# EAGLE board TinkerCad 1-6 (EAGLE 9.7.0)

Size 389.98 x 385.79 mm. Coordinates in mm from the lower left corner, seen from the top.
Outline: 0,0 389.98,0 389.98,385.79 0,385.79 0,0
Copper layers (1*16): Top 0.035mm / dielectric 1.5mm / Bottom 0.035mm
Design rules "default": minimum track width 6mil, minimum drill 0.35mm, track to track 6mil, track to pad 6mil, pad to pad 6mil, via to via 6mil, smd to smd 6mil, copper to edge 40mil, drill to drill 6mil, minimum pad ring 10mil, minimum via ring 8mil, stop-mask expansion 4mil, vias tented up to drill 0mil, thermal gap 10mil

## Footprints (pad centres in the part's own frame; a part is rotated, then mirrored left to right if it is on the bottom)
LEDRD254W60D565H860B_G = drill 0.981 pad 1.581: 1 -1.27,0; 2 1.27,0
LEDRD254W60D565H860B = drill 0.981 pad 1.581: 1 -1.27,0; 2 1.27,0
LEDRD254W60D565H860B_W = drill 0.981 pad 1.581: 1 -1.27,0; 2 1.27,0
HC-SR04 = drill 1.016 long: 1 -3.81,0; 2 -1.27,0; 3 1.27,0; 4 3.81,0
28027 = drill 1.016 long: 1 -2.54,0; 2 0,0; 3 2.54,0
RESAD1016W63L850D250B = drill 0.83 pad 1.43: 1 -5.08,0; 2 5.08,0
SWITCH-MOMENTARY-PTH-6.5MM = drill 1.016 pad 1.88: 1 -3.251,2.261; 2 3.251,2.261; 3 -3.251,-2.261; 4 3.251,-2.261
ARDUINO-UNO-R3-SHIELD = drill 1.016 pad 1.88: 3.3V 24.13,-2.54; 5V 24.13,0; A0 24.13,12.7; A1 24.13,15.24; A2 24.13,17.78; A3 24.13,20.32; A4 24.13,22.86; A5 24.13,25.4; AREF -24.13,-13.97; D2 -24.13,20.32; D3 -24.13,17.78; D4 -24.13,15.24; D5 -24.13,12.7; D6 -24.13,10.16; D7 -24.13,7.62; D8 -24.13,3.81; D9 -24.13,1.27; D10 -24.13,-1.27; D11 -24.13,-3.81; D12 -24.13,-6.35; D13 -24.13,-8.89; GND@0 24.13,2.54; GND@1 24.13,5.08; GND@2 -24.13,-11.43; IOREF 24.13,-7.62; NC 24.13,-10.16; RES 24.13,-5.08; RX -24.13,25.4; SCL -24.13,-19.05; SDA -24.13,-16.51; TX -24.13,22.86; VIN 24.13,7.62

## Placement (x,y rotation side)
D1  GREEN  [LEDRD254W60D565H860B_G]  374.76,343.26 180 top
D2  RED  [LEDRD254W60D565H860B]  382.38,343.26 180 top
D3  WHITE  [LEDRD254W60D565H860B_W]  110.88,190.5 180 top
D4  WHITE  [LEDRD254W60D565H860B_W]  322.08,194.68 180 top
D5  WHITE  [LEDRD254W60D565H860B_W]  320.3,70.6 180 top
D6  RED  [LEDRD254W60D565H860B]  114.94,45.26 180 top
DIST1  DISTANCE-SENSOR-4PINHC-SR04  [HC-SR04]  117.35,332.52 0 top
DIST2  DISTANCE-SENSOR-4PINHC-SR04  [HC-SR04]  336.66,333.1 0 top
PIR1  PIR-SENSOR_28027  [28027]  151.77,63.04 0 top
R1  220  [RESAD1016W63L850D250B]  376.03,335.64 90 top
R2  220  [RESAD1016W63L850D250B]  383.65,335.64 90 top
R3  220  [RESAD1016W63L850D250B]  107.07,175.26 0 top
R4  220  [RESAD1016W63L850D250B]  323.35,187.06 90 top
R5  1000  [RESAD1016W63L850D250B]  343.67,171.82 90 top
R6  220  [RESAD1016W63L850D250B]  321.57,62.98 90 top
R7  1000  [RESAD1016W63L850D250B]  341.89,47.74 90 top
R8  220  [RESAD1016W63L850D250B]  116.21,37.64 90 top
S1  SWITCH_MOMENTARY  [SWITCH-MOMENTARY-PTH-6.5MM]  94.37,184.15 90 top
S2  SWITCH_MOMENTARY  [SWITCH-MOMENTARY-PTH-6.5MM]  341.13,188.33 90 top
S3  SWITCH_MOMENTARY  [SWITCH-MOMENTARY-PTH-6.5MM]  339.35,64.25 90 top
U1  ARDUINO-UNO-R3-SHIELD  [ARDUINO-UNO-R3-SHIELD]  39.75,337.32 180 top
U2  ARDUINO-UNO-R3-SHIELD  [ARDUINO-UNO-R3-SHIELD]  258.71,337.91 180 top
U3  ARDUINO-UNO-R3-SHIELD  [ARDUINO-UNO-R3-SHIELD]  29.84,185.12 180 top
U4  ARDUINO-UNO-R3-SHIELD  [ARDUINO-UNO-R3-SHIELD]  267.62,188.31 180 top
U5  ARDUINO-UNO-R3-SHIELD  [ARDUINO-UNO-R3-SHIELD]  265.84,64.22 180 top
U6  ARDUINO-UNO-R3-SHIELD  [ARDUINO-UNO-R3-SHIELD]  41.92,34.52 180 top

## Library data of the parts
D1 = Tinkercad; CATEGORY: Opto-Electronic; SUB-CATEGORY: LED; VALUE: LED_GREEN
D2 D6 = Tinkercad; CATEGORY: Opto-Electronic; SUB-CATEGORY: LED; VALUE: LED_RED
D3-D5 = Tinkercad; CATEGORY: Opto-Electronic; SUB-CATEGORY: LED; VALUE: LED_WHITE
DIST1 DIST2 PIR1 R1-R8 S1-S3 U1-U6 = Tinkercad

## Nets
D1_A: D1.1 R1.2
D2_A: D2.1 R2.2
D3_A: D3.1 R3.2
D4_A: D4.1 R4.2
D5_A: D5.1 R6.2
D6_A: D6.1 R8.2
S1_3: R3.1 S1.3 S1.4
U1_5V: DIST1.1 U1.5V
U1_D4: DIST1.2 U1.D4
U1_D5: DIST1.3 U1.D5
U1_GND: DIST1.4 U1.GND@0 U1.GND@1 U1.GND@2
U2_5V: DIST2.1 U2.5V
U2_D4: DIST2.2 U2.D4
U2_D5: DIST2.3 U2.D5
U2_D12: R2.1 U2.D12
U2_D13: R1.1 U2.D13
U2_GND: D1.2 D2.2 DIST2.4 U2.GND@0 U2.GND@1 U2.GND@2
U3_5V: S1.1 S1.2 U3.5V
U3_GND: D3.2 U3.GND@0 U3.GND@1 U3.GND@2
U4_5V: S2.1 S2.2 U4.5V
U4_D12: R5.2 S2.3 S2.4 U4.D12
U4_D13: R4.1 U4.D13
U4_GND: D4.2 R5.1 U4.GND@0 U4.GND@1 U4.GND@2
U5_5V: S3.1 S3.2 U5.5V
U5_D12: R7.2 S3.3 S3.4 U5.D12
U5_D13: R6.1 U5.D13
U5_GND: D5.2 R7.1 U5.GND@0 U5.GND@1 U5.GND@2
U6_3.3V: PIR1.2 U6.3.3V
U6_D12: PIR1.1 U6.D12
U6_D13: R8.1 U6.D13
U6_GND: D6.2 PIR1.3 U6.GND@0 U6.GND@1 U6.GND@2

## Tracks (layer width: path | path; a pad name or v marks a point on that pad's centre or on a via)
D1_A  (1 unrouted)
D2_A  (1 unrouted)
D3_A  (1 unrouted)
D4_A  (1 unrouted)
D5_A  (1 unrouted)
D6_A  (1 unrouted)
S1_3  (2 unrouted)
U1_5V  (1 unrouted)
U1_D4  (1 unrouted)
U1_D5  (1 unrouted)
U1_GND  (3 unrouted)
U2_5V  (1 unrouted)
U2_D4  (1 unrouted)
U2_D5  (1 unrouted)
U2_D12  (1 unrouted)
U2_D13  (1 unrouted)
U2_GND  (5 unrouted)
U3_5V  (2 unrouted)
U3_GND  (3 unrouted)
U4_5V  (2 unrouted)
U4_D12  (3 unrouted)
U4_D13  (1 unrouted)
U4_GND  (4 unrouted)
U5_5V  (2 unrouted)
U5_D12  (3 unrouted)
U5_D13  (1 unrouted)
U5_GND  (4 unrouted)
U6_3.3V  (1 unrouted)
U6_D12  (1 unrouted)
U6_D13  (1 unrouted)
U6_GND  (4 unrouted)